# Altium PCB PCB4copy.PcbDoc
Units mil, origin at the board's own origin, x right, y up, seen from the top; angles counter-clockwise.
Board outline 3595 x 3085 mil, 2 copper layers (Top Layer, Bottom Layer); 16 components, 19 nets, 44 pads, 0 vias.
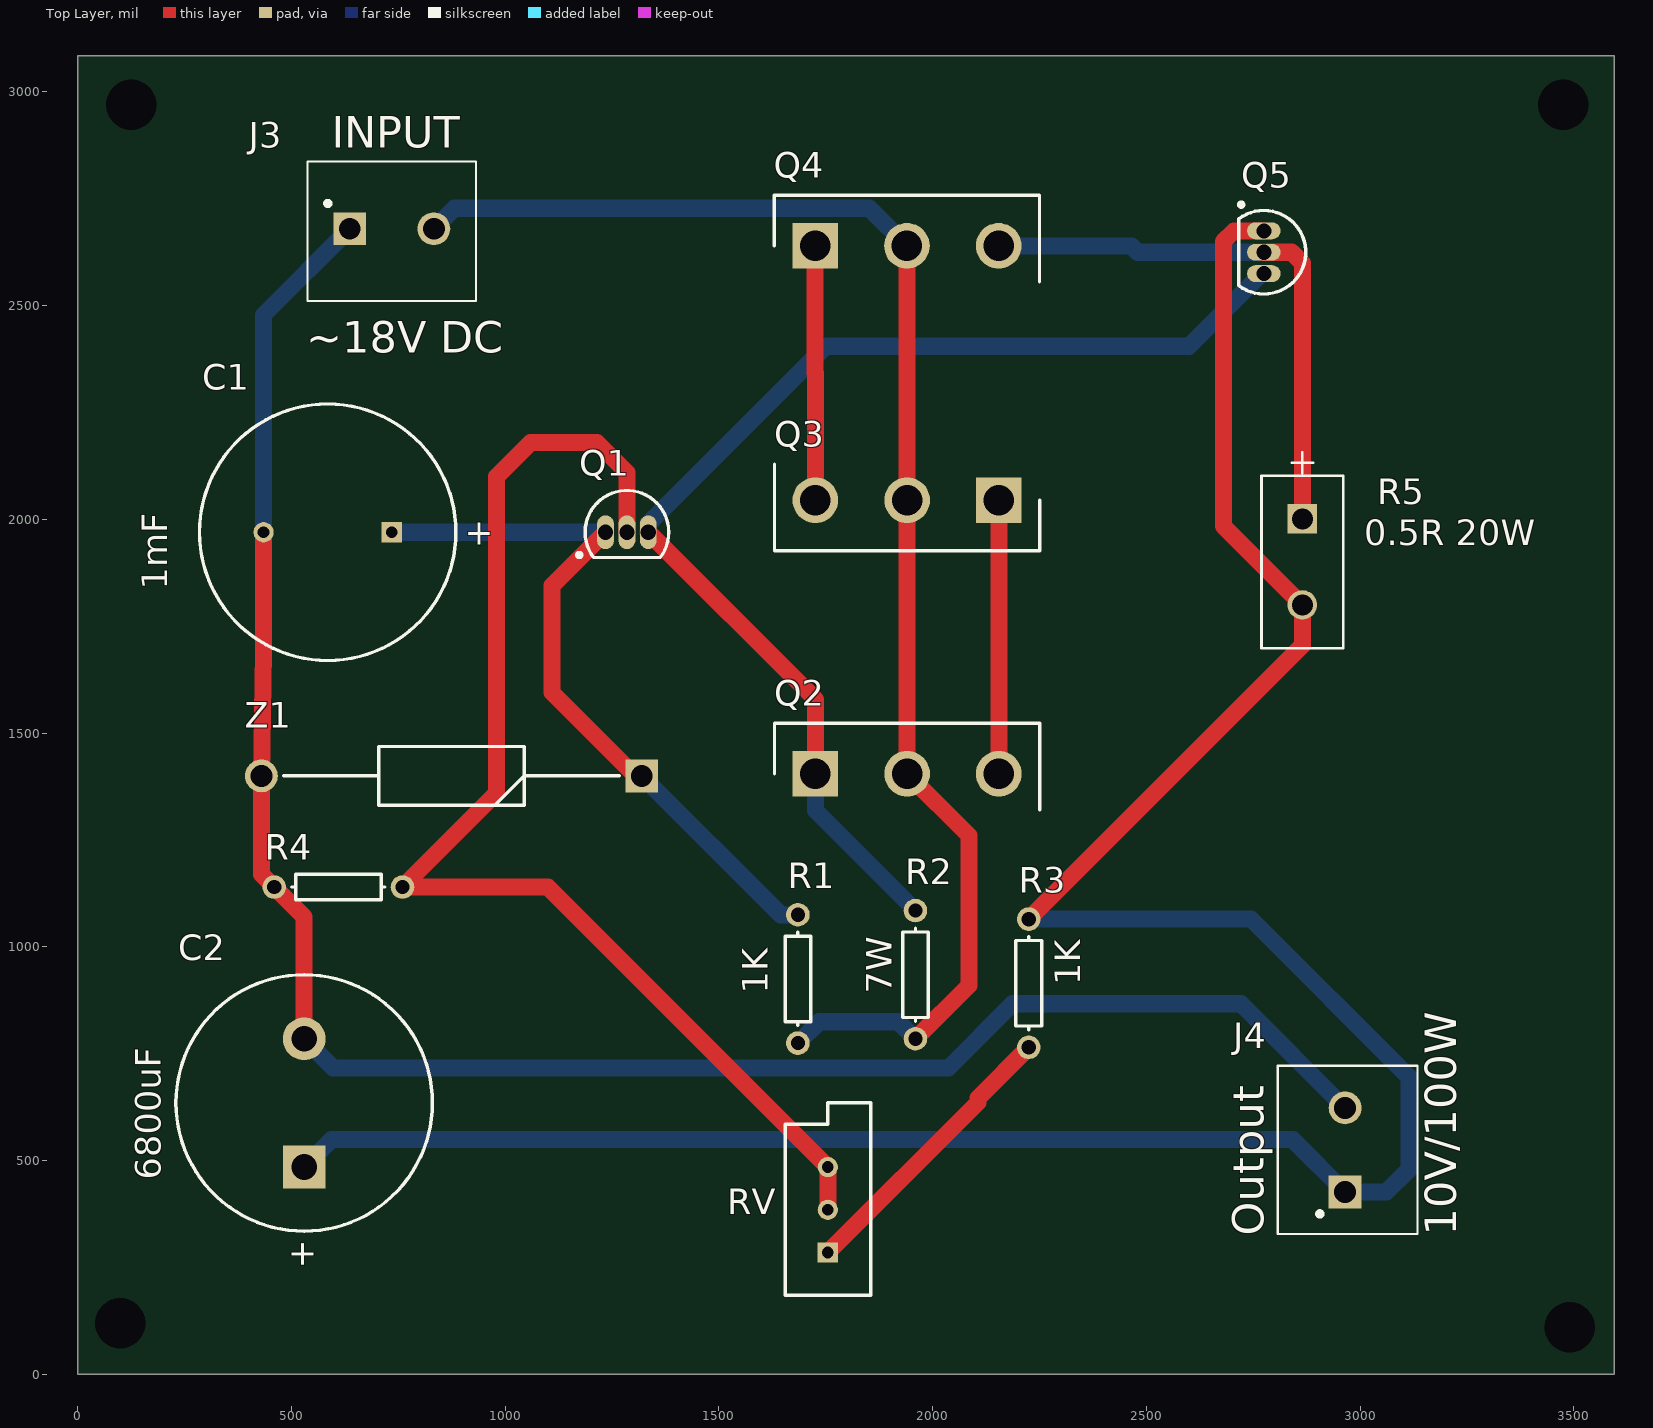
[diagram p0: Top Layer view]
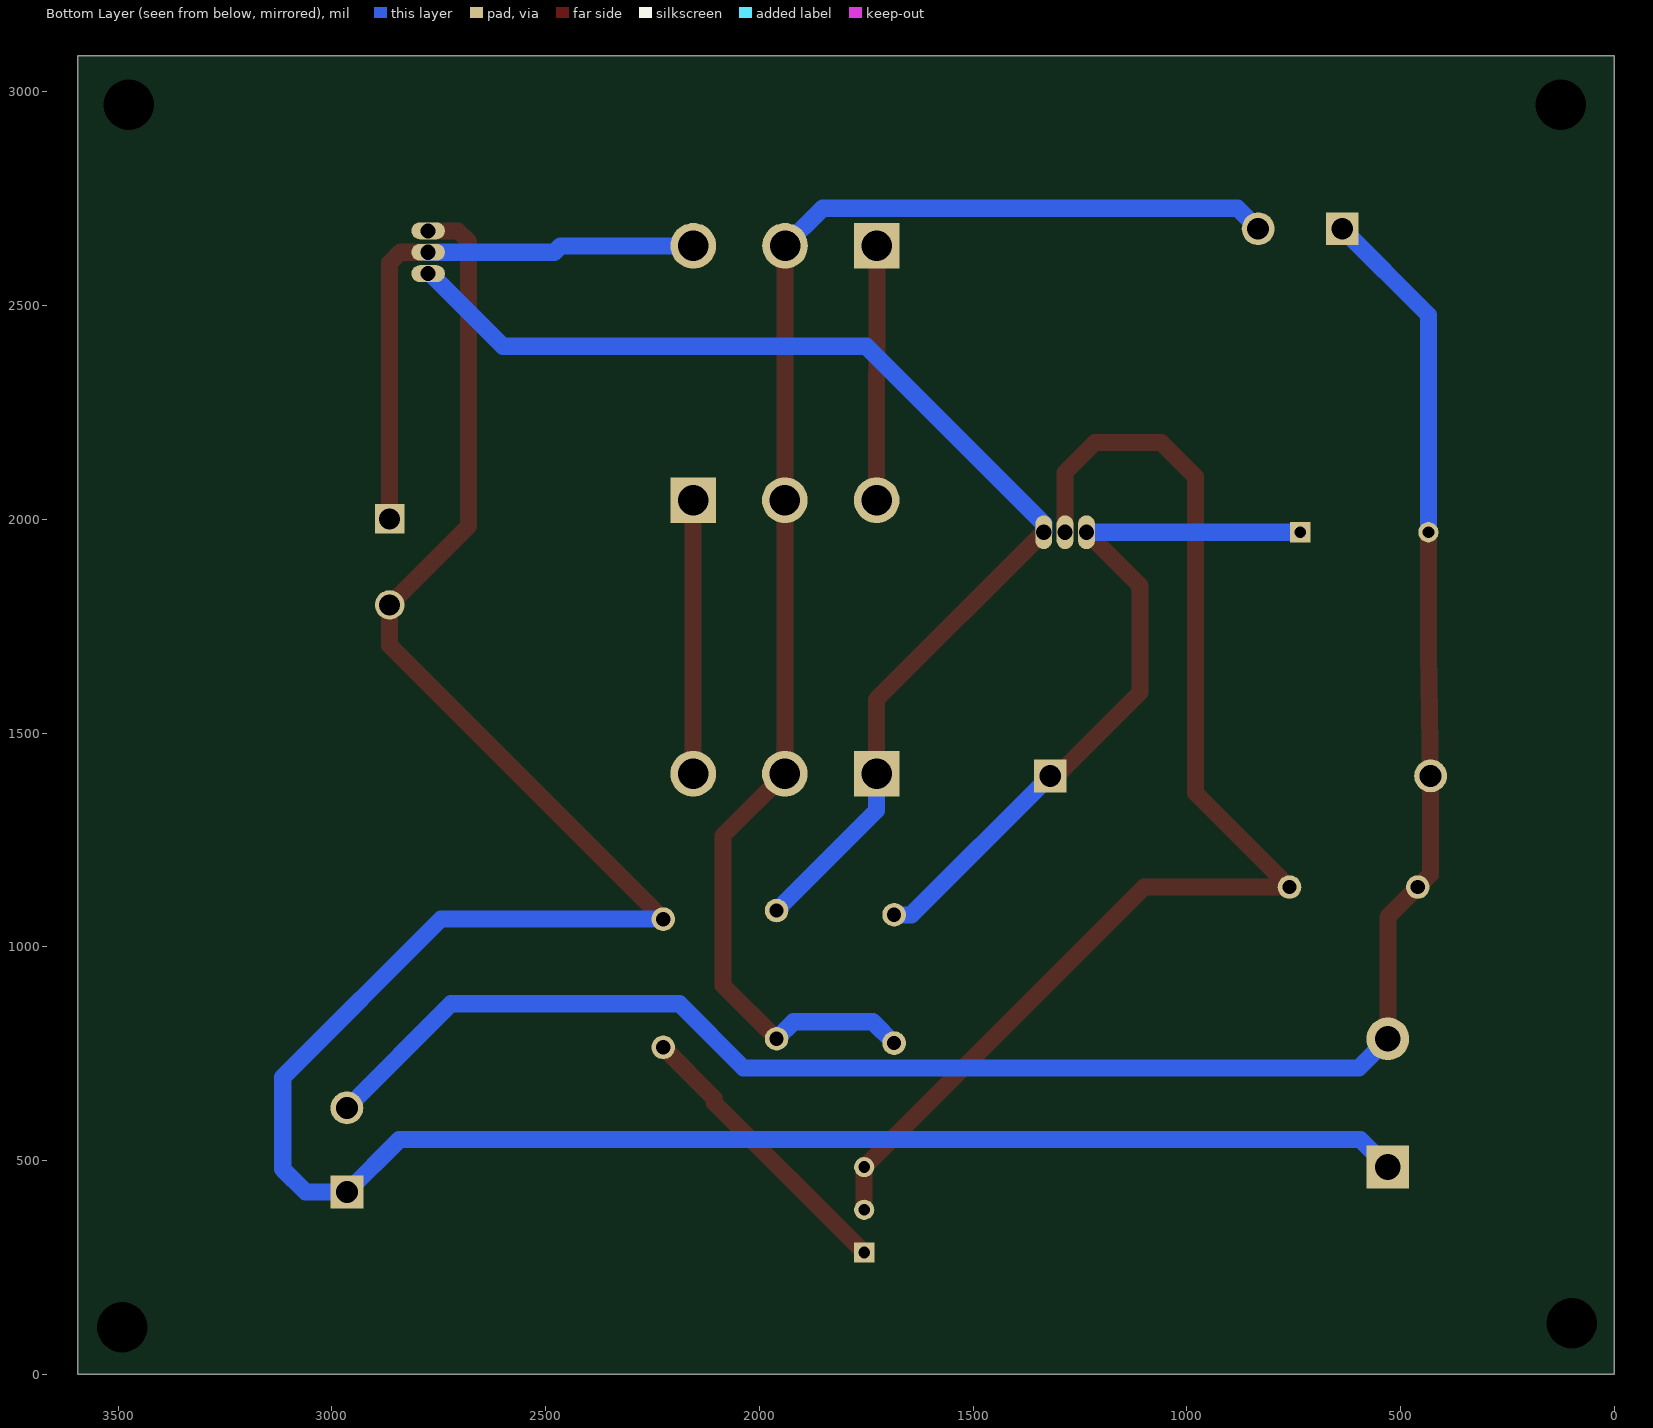
[diagram p1: Bottom Layer view, seen from below]

## Layer stack, top to bottom
Top Solder: solder mask 0.4, Solder Resist, Dk 3.5
Top Layer: signal copper 1.4
Dielectric 1: dielectric 12.6, FR-4, Dk 4.8
Bottom Layer: signal copper 1.4
Bottom Solder: solder mask 0.4, Solder Resist, Dk 3.5

## Board outline
0,0 3595,0 3595,3085 0,3085

## Design rules (kind name [scope] priority, off if disabled: settings)
Clearance [All] p1: gap=10 ignorepadtopadclearanceinfootprint=TRUE except(25: Fill-Fill Fill-Poly Fill-Region Poly-Poly Poly-Region Region-Region)
PolygonConnect [All] p1: connectstyle=Relief reliefconductorwidth=10 reliefentries=4 polygonreliefangle="90 Angle" airgapwidth=10
RoutingVias [All] p1: holewidth=28 width=50 viastyle="Through Hole" minholewidth=28 minwidth=50 maxholewidth=28 maxwidth=50
SolderMaskExpansion [All] p1: expansion=4
Width [All] p1: maxlimit=60 minlimit=30 preferedwidth=40
30 further rules are at their usual default settings.

## Classes and differential pairs
component class Sheet1new: C1 C2 J3 J4 Q1 Q2 Q3 Q4 R1 R2 R3 R4 R5 RV Z1

## Components (designator, comment, footprint, x,y, rotation, side; value= is the part's Value field where it differs from the comment)
C1 "Cap Pol1" RB7.6-15 585,1970 r0 top value=100pF
C2 "Cap Pol1" RB7.6-15 530,635 r270 top value=100pF
J3 "1935161" *PHOENIX_1935161 735,2680 r0 top
J4 "1935161" *PHOENIX_1935161 2965,525 r90 top
Q1 "2N3904" TO-92A 1285,1970 r270 top
Q2 "TIP3055" TO545P515X1560X2445-3P 1725.87,1405 r0 top
Q3 "TIP3055" TO545P515X1560X2445-3P 2155,2045 r180 top
Q4 "TIP3055" TO545P515X1560X2445-3P 1725.43,2640 r0 top
Q5 "2N3904" TO-92A 2775,2625 r180 top
R1 "Res1" AXIAL-0.3 1685,925 r270 top value=100
R2 "Res1" AXIAL-0.3 1960,935 r270 top value=1K
R3 "Res1" AXIAL-0.3 2225,915 r90 top value=1K
R4 "Res1" AXIAL-0.3 610,1140 r0 top value=1K
R5 "TK20PR050JE" RES_TK 2865,1800 r270 top value=0.5
RV "RPot" VR5 1755,385 r90 top value=1K
Z1 "1N5338BG" DIOAD2260W109L864D349 1319.76,1400 r180 top

## Footprints (in the part's own frame and the unit in brackets; to place one, negate y for a bottom-side part, rotate by r counter-clockwise, add the part's x,y. Pads: shape width x height; smd on the part's side, far side on the other; paste and mask are expansions set on the pad)
*PHOENIX_1935161 [mm]
  rect 1.95x1.95 hole 1.3: 1(-2.5,0)
  round 1.95 hole 1.3: 2(2.5,0)
  silkscreen extent -5,-4.3 5,4
AXIAL-0.3 [mm] "Axial Device, Thru-Hole; 2 Leads; 0.3 in Pin Spacing"
  round 1.4 hole 0.85: 1(-3.81,0) 2(3.81,0)
  silkscreen extent -2.77,-0.76 2.77,0.76
DIOAD2260W109L864D349 [mm]
  rect 1.95x1.95 hole 1.3: 1(0,0)
  round 1.95 hole 1.3: 2(22.6,0)
  silkscreen extent 1.33,-1.74 21.27,1.74, body extent -0.54,-1.84 23.14,1.84, height 3.68
RB7.6-15 [mm] "Polarized Capacitor (Radial); 2 Leads"
  rect 1.2x1.2 hole 0.7: 1(3.81,0)
  round 1.2 hole 0.7: 2(-3.81,0)
  silkscreen extent -7.62,-7.62 7.62,7.62
RES_TK [mil]
  rect 69x69 hole 49 mask-1000: 1(-201,0)
  round 69 hole 49 mask-1000: 2(0,0)
  silkscreen extent -358,-96 102,96
TO545P515X1560X2445-3P [mm]
  rect 2.715x2.715 hole 1.81: 1(0,0)
  round 2.715 hole 1.81: 2(5.45,0) 3(10.9,0)
  silkscreen extent -2.43,-2.15 13.33,3, body extent -2.35,-2.15 13.25,3, height 24
TO-92A [mm] "TO, Flat Index; 3 In-Line, Axial Leads; Body Dia. 4.5mm; Leads 0.51 x 0.48 mm (max)"
  oval 2x1 hole 0.9: 1(0,-1.27) 2(0,0) 3(0,1.27)
  silkscreen extent -2.48,-2.95 1.5,2.48, body extent -2.48,-2.5 1.5,2.5, height 6.86
VR5 [mm] "Thru-Hole; 3 Leads"
  rect 1.2x1.2 hole 0.7: 1(-2.54,0)
  round 1.2 hole 0.7: 2(0,0) 3(2.54,0)
  silkscreen extent -5.08,-2.54 6.35,2.54

## Part data
C1 C2: "Polarized Capacitor (Radial)", LatestRevisionDate=17-Jul-2002, LatestRevisionNote="Re-released for DXP Platform.", PackageDescription="Polarized Capacitor (Radial); 2 Leads", PackageReference=RB7.6-15, Published=8-Jun-2000, Publisher="Altium Limited"
J3 J4: "Conn Terminal Blocks 2 POS 5mm Solder ST Thru-Hole 16A", Package=None, Availability=Unavailable, MF="Phoenix Contact", MP=1935161, Price=None, SnapEDA_Link=https://www.snapeda.com/parts/1935161/Phoenix%20Contact/view-part/?ref=snap
Q1 Q5: "NPN General Purpose Amplifier", ComponentLink1Description="Manufacturer Link", ComponentLink1URL=http://www.fairchildsemi.com/, ComponentLink2Description=Datasheet, ComponentLink2URL=http://www.fairchildsemi.com/ds/2N%2F2N3904.pdf, DatasheetVersion=1997, LatestRevisionDate=15-Jan-2003, LatestRevisionNote="PCB Footprint 'BCY-W3/D4.7' replaced", PackageDescription="TO, Flat Index; 3 In-Line, Axial Leads; Body Dia. 4.5mm; Leads 0.51 x 0.48 mm (max)", PackageReference=TO-92A, PackageVersion=Sep-1998, Published=8-Jun-2000, Publisher="Altium Limited"
Q2 Q3 Q4: "Transistor BJT NPN", Manufacturer_Name=STMicroelectronics, Mouser Part Number=511-TIP3055, RS Part Number=1686168, Allied_Number=70014122, Allied Price/Stock=http://www.alliedelec.com/stmicroelectronics-tip3055/70014122/, Datasheet Link=http://www.st.com/web/en/resource/technical/document/datasheet/CD00000918.pdf, Height=5.15mm, Manufacturer_Part_Number=TIP3055, Mouser Price/Stock=https://www.mouser.com/Search/Refine.aspx?Keyword=511-TIP3055, RS Price/Stock=http://uk.rs-online.com/web/p/products/1686168
R1 R2 R3 R4: "Resistor", LatestRevisionDate=17-Jul-2002, LatestRevisionNote="Re-released for DXP Platform.", PackageDescription="Axial Device, Thru-Hole; 2 Leads; 0.3 in Pin Spacing", PackageReference=AXIAL-0.3, Published=8-Jun-2000, Publisher="Altium Limited"
RV: "Potentiometer", LatestRevisionDate=17-Jul-2002, LatestRevisionNote="Re-released for DXP Platform.", PackageDescription="Variable Resistor, Thru-Hole; 3 Leads", PackageReference=VR5, Published=8-Jun-2000, Publisher="Altium Limited", Set Position=0.5, Sim Note="Enter the Resistance value and the set point into parameter fields."
Z1: "Zener Diode", Manufacturer_Name="ON Semiconductor", Mouser Part Number=863-1N5338BG, RS Part Number=0463274P, Allied_Number=70099695, Allied Price/Stock=http://www.alliedelec.com/on-semiconductor-1n5338bg/70099695/, Datasheet Link=http://docs-emea.rs-online.com/webdocs/1385/0900766b813857e1.pdf, Manufacturer_Part_Number=1N5338BG, Mouser Price/Stock=https://www.mouser.com/Search/Refine.aspx?Keyword=863-1N5338BG, RS Price/Stock=http://uk.rs-online.com/web/p/products/0463274P
R5: Built_By=EMA_UL_Team, C="Copyright (C) 2015 Accelerated Designs. All rights reserved", Manufacturer_Part_Number=TK20PR050JE, Vendor=Ohmite

## Free pads (board coordinates)
  round 60 hole 118.11: 2(125,2970) 3(3475,2970) 4(3490,110) 5(100,120)
  round 100 hole 60: 6(530,785)
  rect 100x100 hole 60: 7(530,485)

## Nets (pads, with @x,y where several pads share a name; then routed paths per layer and width w, separated by ;. In a path a pad name is that pad's centre, name@x,y a point inside that pad or via, vN(x,y) a via of type N, cw(c..) or ccw(c..) an arc to the next point about the centre after c; other vN are vias at no path point)
NetC1_1: C1.1 Q1.1 R1.1 Z1.1 | length 1717.2
  Top Layer w40: Q1.1 1110,1845 1110,1595 1305,1400 Z1.1
  Bottom Layer w40: C1.1 Q1.1 ; Z1.1 1644.76,1075 R1.1
NetC1_2: C1.2 C2.2 J3.1 J4.2 pad.6 R4.1 Z1.2 | length 4646.1
  Top Layer w40: C1.2 435,1690 Z1.2 430,1170 R4.1 530,1070 pad.6
  Bottom Layer w40: C1.2 435,2478.43 J3.1 ; pad.6 598,717 2037,717 2187,867 2721.43,867 J4.2
NetC2_1: C2.1 J4.1 pad.7 Q5.1 R3.2 R5.2 | length 5974.5
  Top Layer w40: R3.2 2865,1705 R5.2 2680.16,1984.84 2680.16,2650 2705.16,2675 Q5.1
  Bottom Layer w40: pad.7 594,549 2842.57,549 J4.1 3061.57,426.57 3115,480 3115,695 2745,1065 R3.2
NetC7_1: 
NetC7_2: 
NetC8_1: 
NetC8_2: 
NetD13_1: 
NetD13_2: 
NetD15_2: 
NetD17_1: 
NetD19_1: 
NetJ3_2: J3.2 Q2.2 Q3.2 Q4.2 R1.2 R2.2 | length 3442
  Top Layer w40: Q4.2 1940,2342.43 1940.43,2342 Q3.2 1940.43,1724 Q2.2 2085,1260.43 2085,910 R2.2
  Bottom Layer w40: J3.2 881.43,2728 1852,2728 Q4.2 ; R1.2 1735,825 1920,825 R2.2
NetQ1_2: Q1.2 R4.2 RV.2 RV.3 | length 2924.6
  Top Layer w40: Q1.2 1285,2110 1215,2180 1060,2180 980,2100 980,1360 R4.2 1100,1140 RV.3 RV.2
NetQ1_3: Q1.3 Q2.1 Q5.3 R2.1 | length 2846.2
  Top Layer w40: Q1.3 1725.87,1579.13 Q2.1
  Bottom Layer w40: Q1.3 1335,1990 1750,2405 2600,2405 2770,2575 Q5.3 ; Q2.1 1725.87,1319.13 R2.1
NetQ2_3: Q2.3 Q3.1 | length 640
  Top Layer w40: Q2.3 Q3.1
NetQ3_3: Q3.3 Q4.1 | length 595.2
  Top Layer w40: Q4.1 1725.43,2342.43 1725.87,2342 Q3.3
NetQ4_3: Q4.3 Q5.2 R5.1 | length 1326
  Top Layer w40: Q5.2 2840,2625 2865,2600 R5.1
  Bottom Layer w40: Q4.3 2465,2640 2480,2625 Q5.2
NetR3_1: R3.1 RV.1 | length 674.7
  Top Layer w40: RV.1 2106,636 2106,646 R3.1

## Silkscreen, mask and mechanical layers (free items; w line width, h text height)
Top Overlay:
  text "0.5R 20W" at 3010,1940 h60
  text "1mF" at 210,1835 h60 r90
  text "1K" at 2345,910 h60 r90
  text "1K" at 1615,890 h60 r90
  text "7W" at 1905,890 h60 r90
  text "6800uF" at 195,455 h60 r90

## Text inside footprints (layer, text, board x,y; h text height)
C1: Top Overlay "+" at 905.15,1940.99 h59.06
C2: Top Overlay "+" at 500.99,314.85 h59.06 r270
J3: Top Overlay "~18V DC" at 535,2390 h73.82; Top Overlay "INPUT" at 595,2870 h73.82
J4: Top Overlay "Output" at 2774.56,324.72 h73.82 r90; Top Overlay "10V/100W" at 3225.47,324.49 h73.82 r90